# Altium PCB Cap_Sensor_hand.PcbDoc
Units mm, origin at the board's own origin, x right, y up, seen from the top; angles counter-clockwise.
Board outline 77.76 x 70.14 mm, 2 copper layers (Top Layer, Bottom Layer); 69 components, 50 nets, 250 pads, 279 vias.
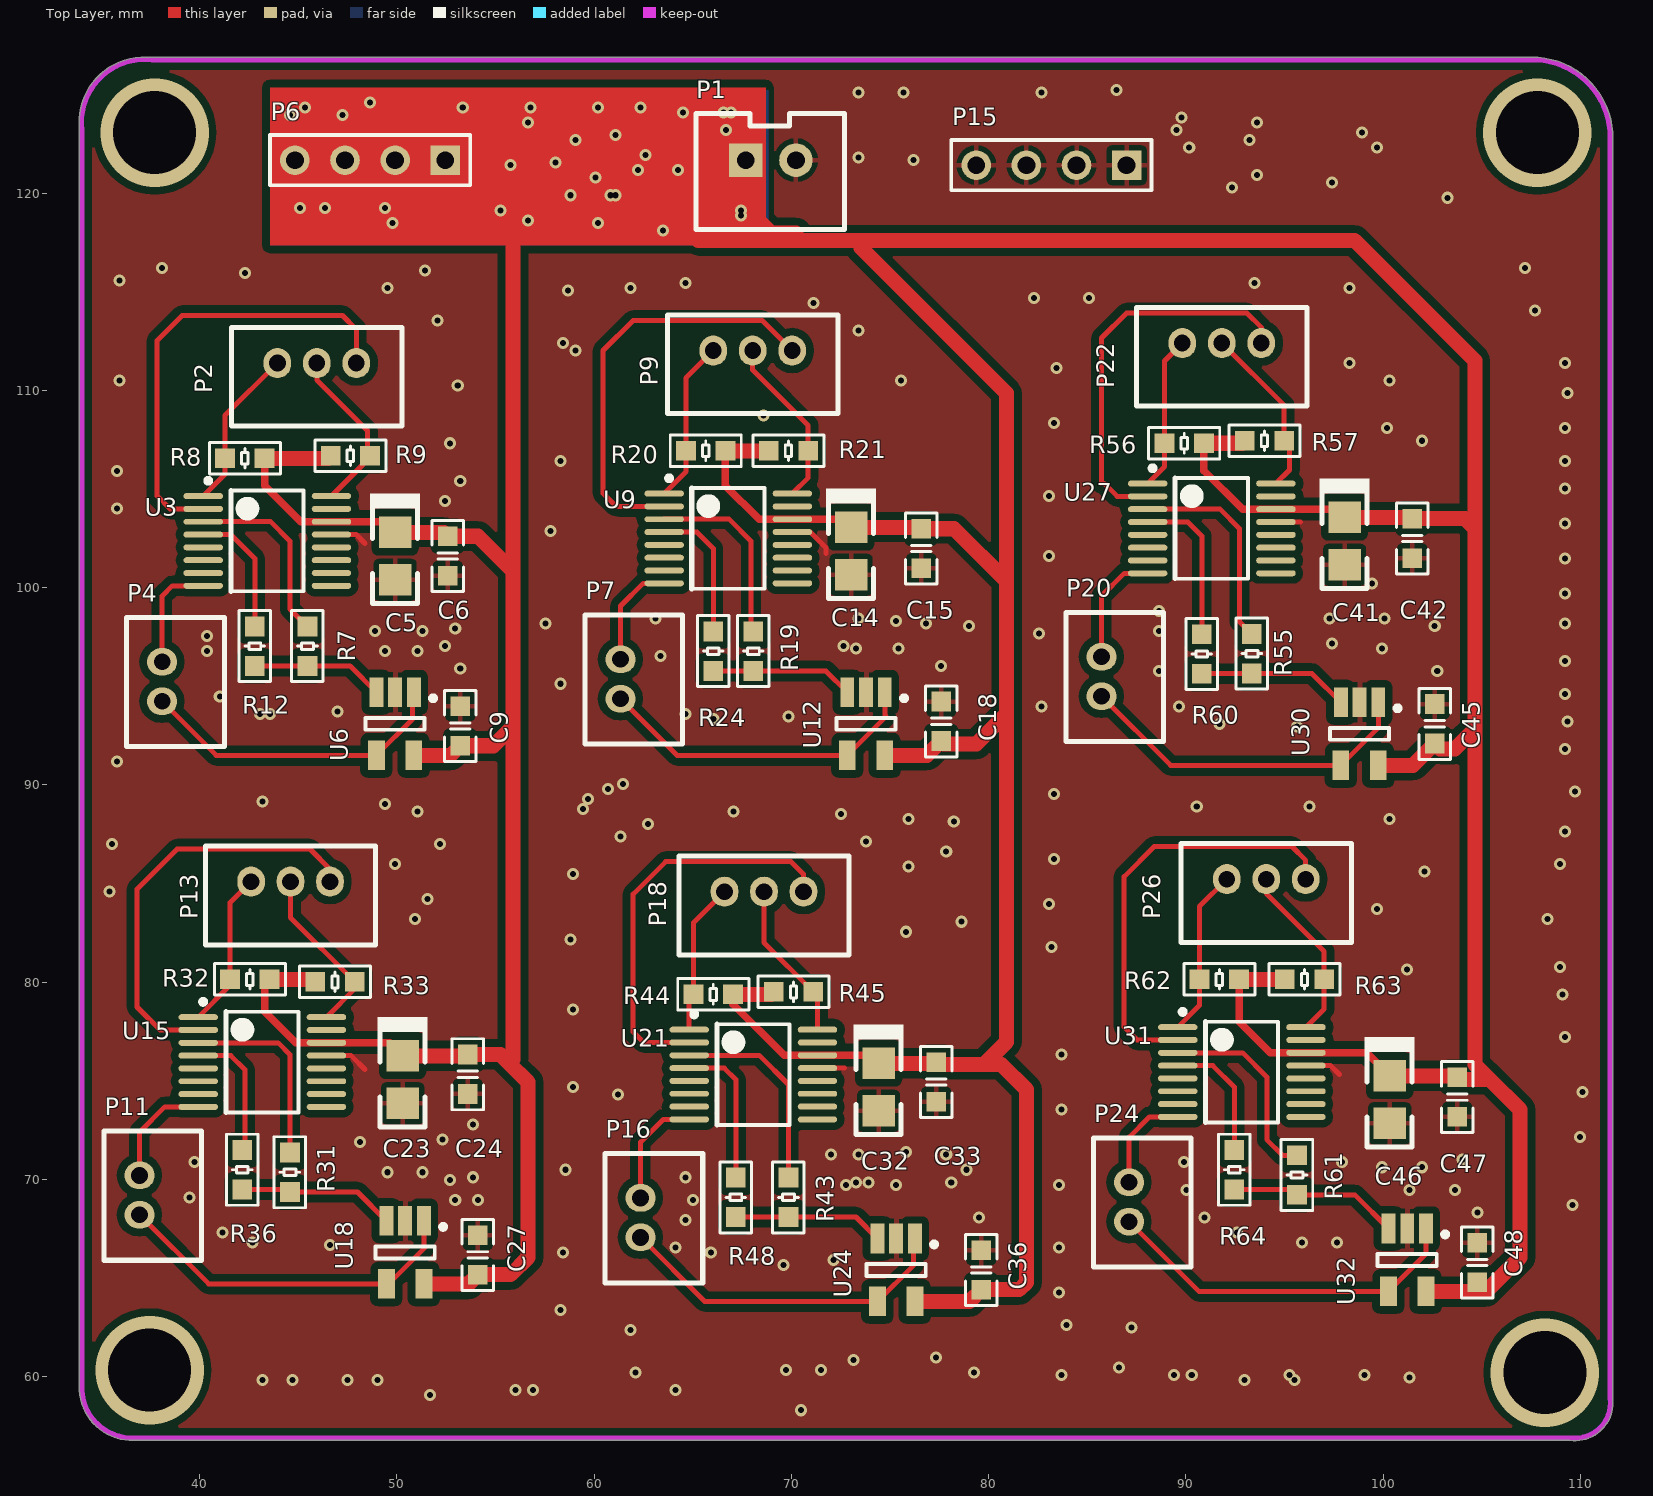
[diagram p0: Top Layer view]
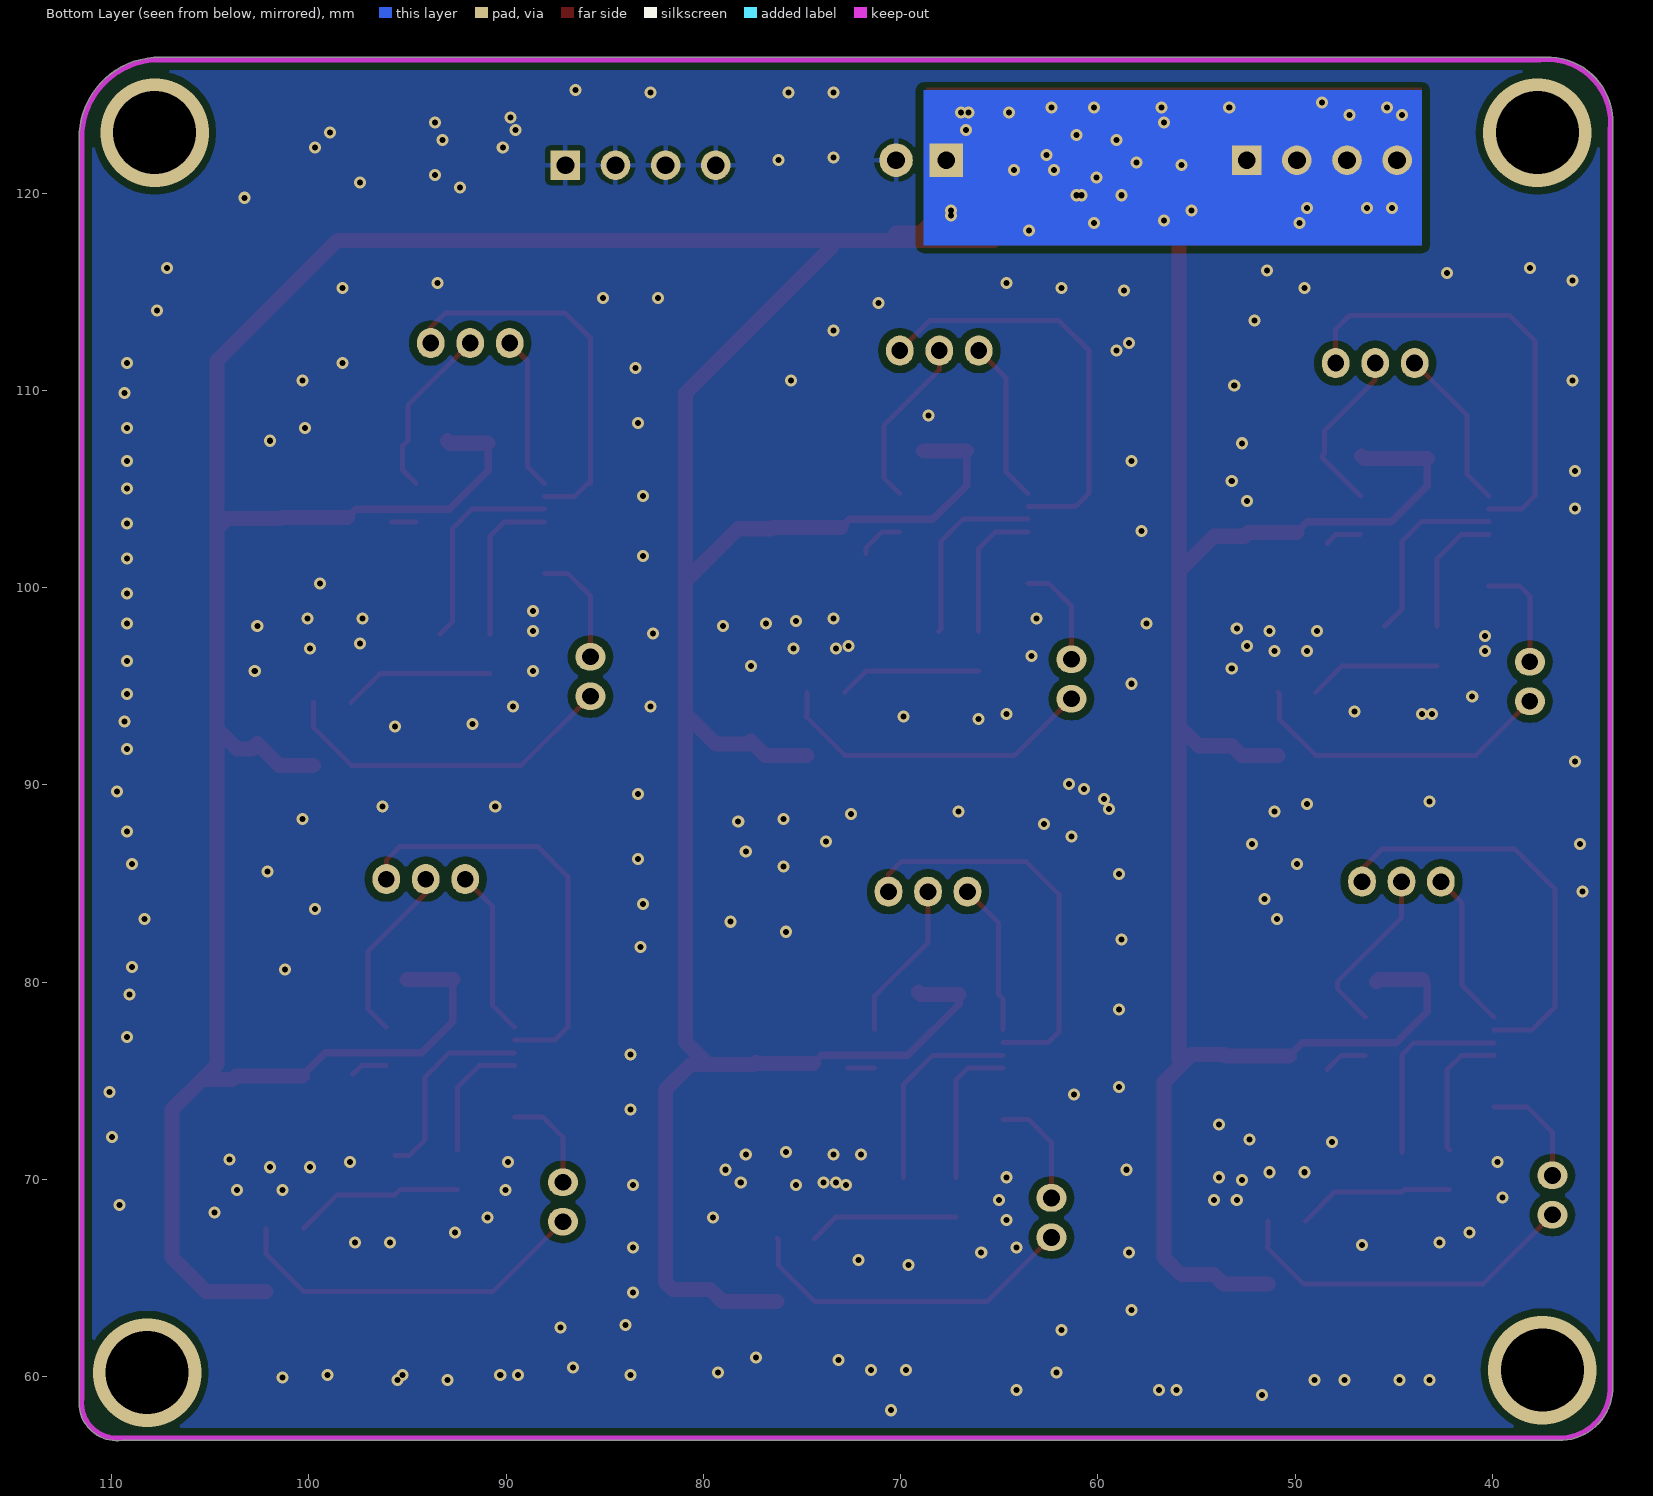
[diagram p1: Bottom Layer view, seen from below]
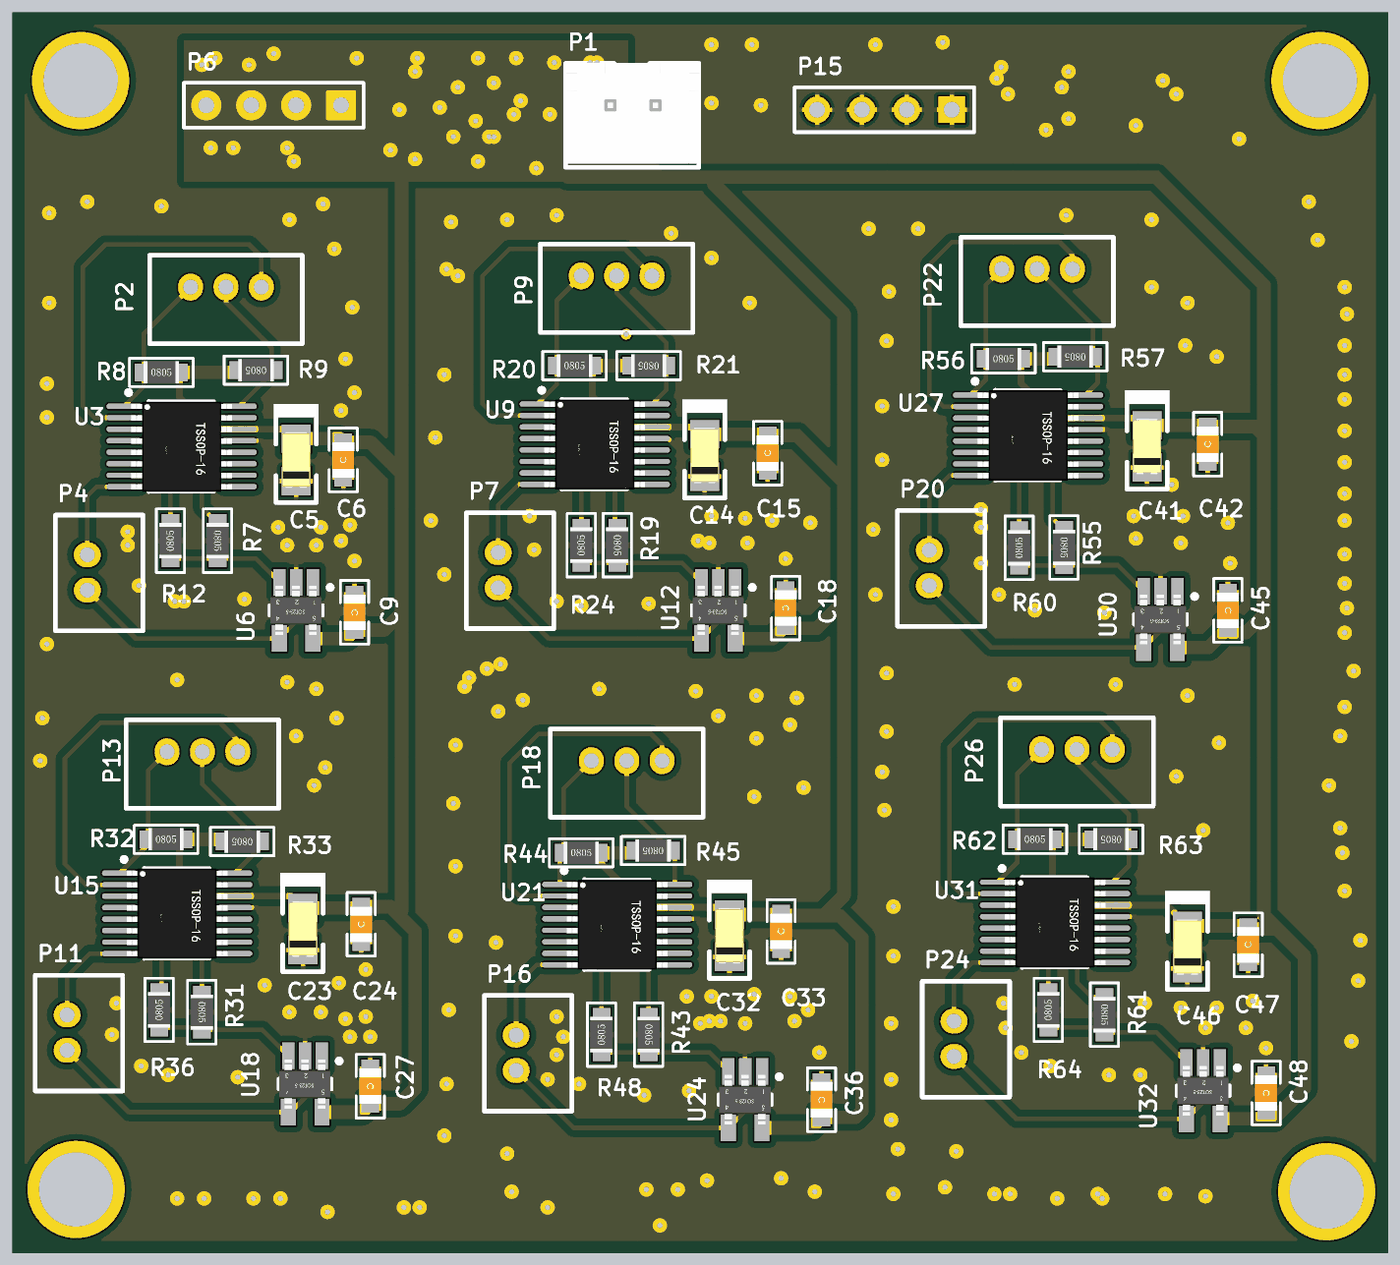
[diagram p2: 3D render of the assembled board from above, using the file's embedded part models]

## Layer stack, top to bottom
Top Solder: solder mask 0.0102, Solder Resist, Dk 3.5
Top Layer: signal copper 0.0356
Dielectric 1: dielectric 0.32, FR-4, Dk 4.8
Bottom Layer: signal copper 0.0356
Bottom Solder: solder mask 0.0102, Solder Resist, Dk 3.5

## Board outline
36.443,56.769 cw(c36.576,59.436) 33.909,59.303 cw(c34.036,59.309) 33.909,59.309 33.909,123.182 cw(c37.211,123.571) 37.6,126.873 107.823,126.873 cw(c107.823,126.746) 107.84,126.872 cw(c107.84,126.745) 107.849,126.872 cw(c107.569,122.809) 111.633,123.071 cw(c107.569,122.809) 111.642,122.809 cw(c111.514,122.809) 111.633,122.764 111.633,58.929 cw(c111.51,58.897) 111.637,58.913 cw(c109.728,58.674) 111.651,58.674 cw(c109.728,58.674) 109.465,56.769 36.449,56.769 cw(c36.449,56.896)

## Design rules (kind name [scope] priority, off if disabled: settings)
Clearance Clearance_1 [InPolygon] p1: gap=0.381 ignorepadtopadclearanceinfootprint=FALSE except(0: Arc-Hole Track-Hole SMDPad-Hole THPad-Hole Via-Hole Fill-Hole Poly-Hole Region-Hole Text-Hole)
Clearance [All] p2: gap=0.152 ignorepadtopadclearanceinfootprint=FALSE except(0: Arc-Hole Track-Hole SMDPad-Hole THPad-Hole Via-Hole Fill-Hole Poly-Hole Region-Hole Text-Hole)
PolygonConnect [All] p1: connectstyle=Relief reliefconductorwidth=0.254 reliefentries=4 polygonreliefangle="90 Angle" airgapwidth=0.254
RoutingVias [All] p1: holewidth=0.711 width=1.27 viastyle="Through Hole" minholewidth=0.711 minwidth=1.27 maxholewidth=0.711 maxwidth=1.27
SolderMaskExpansion [All] p1: expansion=0.102
Width [All] p1: maxlimit=1.27 minlimit=0.254 preferedwidth=0.762
30 further rules are at their usual default settings.

## Classes and differential pairs
component class Cap_Sensor_hand: C5 C6 C9 C14 C15 C18 C23 C24 C27 C32 C33 C36 C41 C42 C45 C46 C47 C48 R7 R8 R9 R12 R19 R20 R21 R24 R31 R32 R33 R36 R43 R44 R45 R48 R55 R56 R57 R60 R61 R62 R63 R64 U3 U6 U9 U12 U15 U18 U21 U24 U27 U30 U31 U32
component class power_and_interface: P1 P2 P4 P6 P7 P9 P11 P13 P15 P16 P18 P20 P22 P24 P26

## Components (designator, comment, footprint, x,y, rotation, side; value= is the part's Value field where it differs from the comment)
C5 "Cap Pol2" Cap-TA 49.911,101.6 r90 top value=10uF
C6 "Cap" 0805C 52.578,101.6 r90 top value=100nF
C9 "Cap" 0805C 53.213,92.98 r270 top value=100nF
C14 "Cap Pol2" Cap-TA 73.025,101.854 r90 top value=10uF
C15 "Cap" 0805C 76.581,101.981 r90 top value=100nF
C18 "Cap" 0805C 77.597,93.218 r270 top value=100nF
C23 "Cap Pol2" Cap-TA 50.292,75.057 r90 top value=10uF
C24 "Cap" 0805C 53.594,75.327 r90 top value=100nF
C27 "Cap" 0805C 54.102,66.167 r270 top value=100nF
C32 "Cap Pol2" Cap-TA 74.422,74.676 r90 top value=10uF
C33 "Cap" 0805C 77.343,74.93 r90 top value=100nF
C36 "Cap" 0805C 79.629,65.405 r270 top value=100nF
C41 "Cap Pol2" Cap-TA 98.044,102.362 r90 top value=10uF
C42 "Cap" 0805C 101.473,102.489 r90 top value=100nF
C45 "Cap" 0805C 102.616,93.091 r270 top value=100nF
C46 "Cap Pol2" Cap-TA 100.33,74.041 r90 top value=10uF
C47 "Cap" 0805C 103.759,74.168 r90 top value=100nF
C48 "Cap" 0805C 104.775,65.786 r270 top value=100nF
P1 "Header 2" XH2.54-LI-2P 68.961,121.666 r0 top
P2 "Header 3" XH2.0_3p 45.942,111.379 r0 top
P4 "Header 2" XH2.0_2p 38.1,95.234 r90 top
P6 "Header 4" HDR1X4 52.451,121.666 r180 top
P7 "Header 2" XH2.0_2p 61.341,95.361 r90 top
P9 "Header 3" XH2.0_3p 68.04,112.014 r0 top
P11 "Header 2" XH2.0_2p 36.957,69.199 r90 top
P13 "Header 3" XH2.0_3p 44.609,85.09 r0 top
P15 "Header 4" HDR1X4 86.995,121.412 r180 top
P16 "Header 2" XH2.0_2p 62.357,68.056 r90 top
P18 "Header 3" XH2.0_3p 68.612,84.582 r0 top
P20 "Header 2" XH2.0_2p 85.725,95.488 r90 top
P22 "Header 3" XH2.0_3p 91.821,112.395 r0 top
P24 "Header 2" XH2.0_2p 87.122,68.85 r90 top
P26 "Header 3" XH2.0_3p 94.075,85.217 r0 top
R7 "Res" 0805R 45.466,97.028 r270 top value=100k
R8 "Res" 0805R 42.291,106.553 r0 top value=3k3
R9 "Res" 0805R 47.641,106.68 r180 top value=3k3
R12 "Res" 0805R 42.799,97.028 r90 top value=118k
R19 "Res" 0805R 68.072,96.774 r270 top value=100k
R20 "Res" 0805R 65.659,106.934 r0 top value=3k3
R21 "Res" 0805R 69.85,106.934 r180 top value=3k3
R24 "Res" 0805R 66.04,96.774 r90 top value=118k
R31 "Res" 0805R 44.577,70.358 r270 top value=100k
R32 "Res" 0805R 42.545,80.137 r0 top value=3k3
R33 "Res" 0805R 46.863,80.01 r180 top value=3k3
R36 "Res" 0805R 42.164,70.485 r90 top value=118k
R43 "Res" 0805R 69.85,69.088 r270 top value=100k
R44 "Res" 0805R 66.04,79.375 r0 top value=3k3
R45 "Res" 0805R 70.104,79.502 r180 top value=3k3
R48 "Res" 0805R 67.183,69.088 r90 top value=118k
R55 "Res" 0805R 93.345,96.647 r270 top value=100k
R56 "Res" 0805R 89.916,107.315 r0 top value=3k3
R57 "Res" 0805R 93.98,107.442 r180 top value=3k3
R60 "Res" 0805R 90.805,96.631 r90 top value=118k
R61 "Res" 0805R 95.631,70.215 r270 top value=100k
R62 "Res" 0805R 91.694,80.137 r0 top value=3k3
R63 "Res" 0805R 96.012,80.137 r180 top value=3k3
R64 "Res" 0805R 92.456,70.485 r90 top value=118k
U3 "AD7746" TSSOP16 43.434,102.362 r0 top
U6 "AD8515" sot23-5 49.911,93.091 r270 top
U9 "AD7746" TSSOP16 66.802,102.489 r0 top
U12 "AD8515" sot23-5 73.787,93.091 r270 top
U15 "AD7746" TSSOP16 43.18,75.946 r0 top
U18 "AD8515" sot23-5 50.419,66.294 r270 top
U21 "AD7746" TSSOP16 68.072,75.311 r0 top
U24 "AD8515" sot23-5 75.311,65.405 r270 top
U27 "AD7746" TSSOP16 91.313,102.997 r0 top
U30 "AD8515" sot23-5 98.806,92.583 r270 top
U31 "AD7746" TSSOP16 92.837,75.438 r0 top
U32 "AD8515" sot23-5 101.219,65.913 r270 top

## Footprints (in the part's own frame and the unit in brackets; to place one, negate y for a bottom-side part, rotate by r counter-clockwise, add the part's x,y. Pads: shape width x height; smd on the part's side, far side on the other; paste and mask are expansions set on the pad)
0805C [mm]
  rect 1x1 smd: 1(-1,0) 2(1,0)
  silkscreen extent -1.8,-0.8 1.8,0.8, body extent -1.01,-0.62 1,0.63, height 0.92
0805R [mm]
  rect 1x1 smd: 1(-1,0) 2(1,0)
  silkscreen extent -1.8,-0.8 1.8,0.8, body extent -1,-0.63 1,0.63, height 0.55
Cap-TA [mm]
  rect 1.6x1.65 smd: 1(1.2,0) 2(-1.2,0)
  silkscreen extent -2.41,-1.27 3.17,1.27, body extent -1.6,-0.8 1.6,0.8, height 1.61
HDR1X4 [mm] "Connector; Header; 4 Position"
  rect 1.5x1.5 hole 0.9: 1(0,0)
  round 1.5 hole 0.9: 2(2.54,0) 3(5.08,0) 4(7.62,0)
  silkscreen extent -1.27,-1.27 8.89,1.27
sot23-5 [mm]
  rect 1.5x0.7 smd: 1(-1.595,0.95) 2(-1.595,0) 3(-1.595,-0.95)
  rect 1.5x0.85 smd: 4(1.595,-0.95) 5(1.595,0.95)
  silkscreen extent -1.42,-1.5 0.3,2.05, body extent -1.39,-1.46 1.41,1.44, height 1.09
TSSOP16 [mm]
  oval 2x0.3 smd: 1(-3.25,2.275) 2(-3.25,1.625) 3(-3.25,0.975) 4(-3.25,0.325) 5(-3.25,-0.325) 6(-3.25,-0.975) 7(-3.25,-1.625) 8(-3.25,-2.275) 9(3.25,-2.275) 10(3.25,-1.625) 11(3.25,-0.975) 12(3.25,-0.325) 13(3.25,0.325) 14(3.25,0.975) 15(3.25,1.625) 16(3.25,2.275)
  silkscreen extent -3.12,-2.55 1.83,3.17, body extent -2.85,-2.56 2.85,2.54, height 1.45
XH2.0_2p [mm]
  oval 1.4x1.524 hole 0.85: 1(-1,0) 2(1,0)
  silkscreen extent -3.3,-3.15 3.25,1.8
XH2.0_3p [mm]
  oval 1.4x1.524 hole 0.85: 1(-2,0) 2(0,0) 3(2,0)
  silkscreen extent -4.32,-3.2 4.32,1.8
XH2.54-LI-2P [mm] "接插件，2P"
  rect 1.7x1.7 hole 0.9: 1(-1.27,0)
  round 1.7 hole 0.9: 2(1.27,0)
  silkscreen extent -3.81,-3.51 3.74,2.37, body extent -3.77,-3.3 3.77,2.4, height 7.05

## Part data
C5 C14 C23 C32 C41 C46: "Polarized Capacitor (Axial)", LatestRevisionDate=17-Jul-2002, LatestRevisionNote="Re-released for DXP Platform.", PackageDescription="Polarized Capacitor; 2 Leads", PackageReference=POLAR0.8, Published=8-Jun-2000, Publisher="Altium Limited"
C6 C9 C15 C18 C24 C27 C33 C36 C42 C45 C47 C48: "Capacitor", LatestRevisionDate=17-Jul-2002, LatestRevisionNote="Re-released for DXP Platform.", PackageDescription="Radial Cap, Thru-Hole; 2 Leads; 0.3 in Pin Spacing", PackageReference=RAD-0.3, Published=8-Jun-2000, Publisher="Altium Limited"
P1 P4 P7 P11 P16 P20 P24: "Header, 2-Pin", LatestRevisionDate=17-Jul-2002, LatestRevisionNote="Re-released for DXP Platform.", Publisher="Altium Limited"
P2 P9 P13 P18 P22 P26: "Header, 3-Pin", LatestRevisionDate=17-Jul-2002, LatestRevisionNote="Re-released for DXP Platform.", Publisher="Altium Limited"
P6 P15: "Header, 4-Pin", LatestRevisionDate=17-Jul-2002, LatestRevisionNote="Re-released for DXP Platform.", Publisher="Altium Limited"
R7 R8 R9 R12 R19 R20 R21 R24 R31 R32 R33 R36 R43 R44 R45 R48 R55 R56 R57 R60 R61 R62 R63 R64: "Resistor", LatestRevisionDate=17-Jul-2002, LatestRevisionNote="Re-released for DXP Platform.", PackageDescription="Axial Device, Thru-Hole; 2 Leads; 0.4 in Pin Spacing", PackageReference=AXIAL-0.4, Published=8-Jun-2000, Publisher="Altium Limited"

## Via types
v1: diameter 0.61, hole 0.305, Top Layer to Bottom Layer, 275 vias
v2: diameter 5.5, hole 4.2, Top Layer to Bottom Layer, 4 vias

## Nets (pads, with @x,y where several pads share a name; then routed paths per layer and width w, separated by ;. In a path a pad name is that pad's centre, name@x,y a point inside that pad or via, vN(x,y) a via of type N, cw(c..) or ccw(c..) an arc to the next point about the centre after c; other vN are vias at no path point)
GND: C5.2 C6.1 C9.1 C14.2 C15.1 C18.1 C23.2 C24.1 C27.1 C32.2 C33.1 C36.1 C41.2 C42.1 C45.1 C46.2 C47.1 C48.1 P1.2 P15.1 P15.2 P15.3 P15.4 U3.13 U6.2 U9.13 U12.2 U15.13 U18.2 U21.13 U24.2 U27.13 U30.2 U31.13 U32.2 | length 11
  Top Layer w0.254: U15.13 47.681,76.271 48.387,75.565 ; U3.13 47.935,102.687 48.387,102.235 ; U9.13 70.959,102.814 71.755,102.018 71.755,101.727 ; U21.13 72.7,75.636 ; U27.13 95.814,103.322 ; U31.13 97.338,75.763 97.79,75.311
  other v1: 70.485,58.293 51.689,59.055 56.007,59.309 56.896,59.309 64.135,59.309 43.18,59.817 44.704,59.817 47.498,59.817 49.022,59.817 92.964,59.817 95.504,59.817 101.346,59.944 83.693,60.071 89.408,60.071 90.297,60.071 95.25,60.071 99.06,60.071 62.103,60.198 79.248,60.198 69.723,60.325 71.501,60.325 86.614,60.452 73.152,60.833 77.343,60.96 61.849,62.357 87.249,62.484 83.947,62.611 58.293,63.373 83.566,64.262 69.596,65.659 72.136,65.913 58.42,66.294 65.913,66.294 64.135,66.548 83.566,66.548 46.609,66.675 42.672,66.802 95.885,66.802 97.663,66.802 41.148,67.31 92.583,67.31 64.643,67.945 79.502,68.072 90.932,68.072 104.775,68.326 109.601,68.707 52.959,68.961 54.102,68.961 65.024,68.961 39.497,69.088 90.043,69.469 101.346,69.469 103.632,69.469 72.771,69.723 75.311,69.723 83.566,69.723 73.279,69.85 73.914,69.85 78.105,69.85 52.705,69.977 53.848,70.104 64.643,70.104 49.53,70.358 51.308,70.358 58.547,70.485 78.867,70.485 99.949,70.612 101.981,70.612 39.751,70.866 89.916,70.866 97.917,70.866 104.013,70.993 72.009,71.247 73.406,71.247 77.851,71.247 75.819,71.374 48.133,71.882 52.324,72.009 109.982,72.136 53.848,72.771 83.693,73.533 61.214,74.295 110.109,74.422 58.928,74.676 83.693,76.327 109.22,77.216 58.928,78.613 109.093,79.375 101.219,80.645 108.966,80.772 83.185,81.788 58.801,82.169 75.819,82.55 78.613,83.058 50.927,83.185 108.331,83.185 99.695,83.693 83.058,83.947 51.562,84.201 35.433,84.582 58.928,85.471 102.108,85.598 75.946,85.852 49.911,85.979 108.966,85.979 83.312,86.233 77.851,86.614 35.56,86.995 52.197,86.995 73.787,87.122 61.341,87.376 109.22,87.63 62.738,88.011 78.232,88.138 75.946,88.265 100.33,88.265 72.517,88.519 51.054,88.646 67.056,88.646 59.436,88.773 90.551,88.9 96.266,88.9 49.403,89.027 43.18,89.154 59.69,89.281 83.312,89.535 109.728,89.662 60.706,89.789 61.468,90.043 35.814,91.186 109.22,91.821 95.631,92.964 91.694,93.091 109.347,93.218 66.04,93.345 69.85,93.472 43.053,93.599 43.561,93.599 64.643,93.599 46.99,93.726 82.677,93.98 89.662,93.98 41.021,94.488 109.22,94.615 58.293,95.123 88.646,95.758 102.743,95.758 53.213,95.885 77.597,96.012 109.22,96.266 63.373,96.52 40.386,96.774 49.403,96.774 51.054,96.774 73.279,96.901 75.438,96.901 99.949,96.901 52.451,97.028 72.644,97.028 97.409,97.155 40.386,97.536 82.55,97.663 48.895,97.79 51.308,97.79 88.646,97.79 52.959,97.917 78.994,98.044 102.616,98.044 57.531,98.171 76.835,98.171 109.22,98.171 75.311,98.298 63.119,98.425 73.406,98.425 97.282,98.425 100.076,98.425 88.646,98.806 109.22,99.695 99.441,100.203 109.22,101.473 83.058,101.6 57.785,102.87 109.22,103.251 35.814,104.013 52.451,104.394 83.058,104.648 109.22,105.029 53.213,105.41 35.814,105.918 58.293,106.426 109.22,106.426 52.705,107.315 101.981,107.442 100.203,108.077 109.22,108.077 83.312,108.331 68.58,108.712 109.347,109.855 53.086,110.236 35.941,110.49 75.565,110.49 100.33,110.49 83.439,111.125 98.298,111.379 109.22,111.379 59.055,112.014 58.42,112.395 73.406,113.03 52.07,113.538 107.696,114.046 71.12,114.427 82.296,114.681 85.09,114.681 58.674,115.062 49.53,115.189 61.849,115.189 98.298,115.189 64.643,115.443 93.472,115.443 35.941,115.57 42.291,115.951 51.435,116.078 38.1,116.205 107.188,116.205 103.251,119.761 92.329,120.269 97.409,120.523 93.599,120.904 76.2,121.666 73.406,121.793 90.17,122.301 99.695,122.301 93.218,122.682 98.933,123.063 89.535,123.19 93.599,123.571 89.789,123.825 73.406,125.095 75.692,125.095 82.677,125.095 86.487,125.222
NetR7_1: R7.1 U3.3 | length 9.5
  Top Layer w0.254: U3.3 43.602,103.337 44.577,102.362 44.577,98.917 R7.1
NetR7_2: R7.2 R12.1 U6.3 | length 6.7
  Top Layer w0.254: R12.1 R7.2 47.619,96.028 U6.3
NetR12_2: R12.2 U3.4 | length 6.6
  Top Layer w0.254: U3.4 41.585,102.687 42.799,101.473 R12.2
NetR19_1: R19.1 U9.3 | length 9.5
  Top Layer w0.254: U9.3 66.843,103.464 67.945,102.362 67.945,97.901 R19.1
NetR19_2: R19.2 R24.1 U12.3 | length 7.2
  Top Layer w0.254: R24.1 R19.2 71.749,95.774 U12.3
NetR24_2: R24.2 U9.4 | length 7
  Top Layer w0.254: U9.4 65.207,102.814 66.04,101.981 R24.2
NetR31_1: R31.1 U15.3 | length 9.9
  Top Layer w0.254: U15.3 43.983,76.921 44.577,76.327 R31.1
NetR31_2: R31.2 R36.1 U18.3 | length 8
  Top Layer w0.254: R36.1 44.45,69.485 R31.2 48,69.358 U18.3
NetR36_2: R36.2 U15.4 | length 6.8
  Top Layer w0.254: U15.4 41.585,76.271 42.291,75.565 42.291,71.612 R36.2
NetR43_1: R43.1 U21.3 | length 10.4
  Top Layer w0.254: U21.3 68.367,76.286 69.85,74.803 R43.1
NetR43_2: R43.2 R48.1 U24.3 | length 7.6
  Top Layer w0.254: R48.1 R43.2 73.273,68.088 U24.3
NetR48_2: R48.2 U21.4 | length 7.6
  Top Layer w0.254: U21.4 66.604,75.636 67.183,75.057 R48.2
NetR55_1: R55.1 U27.3 | length 10.7
  Top Layer w0.254: U27.3 91.735,103.972 92.71,102.997 92.71,98.282 R55.1
NetR55_2: R55.2 R60.1 U30.3 | length 7.7
  Top Layer w0.254: R60.1 93.329,95.631 R55.2 96.387,95.647 U30.3
NetR60_2: R60.2 U27.4 | length 8
  Top Layer w0.254: U27.4 90.099,103.322 90.805,102.616 R60.2
NetR61_1: R61.1 U31.3 | length 10.1
  Top Layer w0.254: U31.3 92.878,76.413 94.107,75.184 94.107,72.009 94.901,71.215 R61.1
NetR61_2: R61.2 R64.1 U32.3 | length 8.6
  Top Layer w0.254: R64.1 95.361,69.485 R61.2 98.562,69.215 U32.3
NetR64_2: R64.2 U31.4 | length 6.5
  Top Layer w0.254: U31.4 91.369,75.763 92.456,74.676 R64.2
RDY1: P2.3 U3.2 | length 23.1
  Top Layer w0.254: U3.2 38.507,103.987 37.846,104.648 37.846,112.522 39.116,113.792 47.243,113.792 47.942,113.093 P2.3
RDY2: P9.3 U9.2 | length 21.5
  Top Layer w0.254: U9.2 61.24,104.114 61.214,104.14 61.087,104.14 60.452,104.775 60.452,112.014 61.976,113.538 68.516,113.538 P9.3
RDY3: P13.3 U15.2 | length 21.2
  Top Layer w0.254: U15.2 37.999,77.571 36.83,78.74 36.83,84.709 38.862,86.741 45.593,86.741 46.609,85.725 P13.3
RDY4: P18.3 U21.2 | length 20.5
  Top Layer w0.254: U21.2 62.51,76.936 61.976,77.47 61.976,84.455 63.627,86.106 69.977,86.106 70.612,85.471 P18.3
RDY5: P22.3 U27.2 | length 19.7
  Top Layer w0.254: U27.2 86.513,104.622 85.852,105.283 85.725,105.283 85.725,112.649 86.995,113.919 93.091,113.919 93.821,113.189 P22.3
RDY6: P26.3 U31.2 | length 21.7
  Top Layer w0.254: U31.2 87.529,77.063 86.868,77.724 86.868,85.344 88.392,86.868 95.377,86.868 96.075,86.17 P26.3
SCL1: P2.1 R8.1 U3.1 | length 8.3
  Top Layer w0.254: U3.1 41.291,105.744 R8.1 41.291,108.728 P2.1
SCL2: P9.1 R20.1 U9.1 | length 8.3
  Top Layer w0.254: U9.1 64.659,105.871 R20.1 64.659,110.633 P9.1
SCL3: P13.1 R32.1 U15.1 | length 8
  Top Layer w0.254: U15.1 41.545,79.836 R32.1 41.545,84.026 P13.1
SCL4: P18.1 R44.1 U21.1 | length 7.7
  Top Layer w0.254: U21.1 64.822,79.157 R44.1 65.04,83.01 P18.1
SCL5: P22.1 R56.1 U27.1 | length 7.9
  Top Layer w0.254: U27.1 88.916,106.125 R56.1 88.916,111.49 P22.1
SCL6: P26.1 R62.1 U31.1 | length 8.5
  Top Layer w0.254: U31.1 90.694,78.82 R62.1 90.694,83.836 P26.1
SDA1: P2.2 R9.1 U3.16 | length 8.7
  Top Layer w0.254: P2.2 45.942,110.522 48.514,107.95 48.514,106.807 R9.1 48.641,106.594 U3.16
SDA2: P9.2 R21.1 U9.16 | length 8.7
  Top Layer w0.254: P9.2 68.04,111.03 70.85,108.22 R21.1 70.85,105.562 U9.16
SDA3: P13.2 R33.1 U15.16 | length 8.8
  Top Layer w0.254: P13.2 44.609,83.264 R33.1 47.863,79.654 U15.16
SDA4: P18.2 R45.1 U21.16 | length 8.1
  Top Layer w0.254: P18.2 68.612,81.994 R45.1 71.322,79.284 U21.16
SDA5: P22.2 R57.1 U27.16 | length 8.8
  Top Layer w0.254: P22.2 94.98,109.236 R57.1 95.25,107.172 95.25,105.959 U27.16
SDA6: P26.2 R63.1 U31.16 | length 9.1
  Top Layer w0.254: P26.2 94.075,84.487 97.012,81.55 R63.1 97.012,78.638 U31.16
SwitchDown_1: P4.2 U3.8 | length 5.6
  Top Layer w0.254: P4.2 38.1,99.568 38.619,100.087 U3.8
SwitchDown_2: P7.2 U9.8 | length 5.4
  Top Layer w0.254: P7.2 61.341,99.06 62.495,100.214 U9.8
SwitchDown_3: P11.2 U15.8 | length 5.7
  Top Layer w0.254: P11.2 36.957,72.39 38.238,73.671 U15.8
SwitchDown_4: P16.2 U21.8 | length 5.8
  Top Layer w0.254: P16.2 62.357,71.882 63.511,73.036 U21.8
SwitchDown_5: P20.2 U27.8 | length 5.9
  Top Layer w0.254: P20.2 85.725,99.568 86.879,100.722 U27.8
SwitchDown_6: P24.2 U31.8 | length 5.2
  Top Layer w0.254: P24.2 87.122,72.136 88.149,73.163 U31.8
SwitchUp_1: P4.1 U6.1 U6.4 | length 16
  Top Layer w0.254: P4.1 40.838,91.496 U6.4 50.8,93.335 50.8,94.625 U6.1
SwitchUp_2: P7.1 U12.1 U12.4 | length 16.7
  Top Layer w0.254: P7.1 64.206,91.496 U12.4 72.837,91.506 74.803,93.472 74.737,93.538 U12.1
SwitchUp_3: P11.1 U18.1 U18.4 | length 18.1
  Top Layer w0.254: P11.1 40.457,64.699 U18.4 49.586,64.699 51.435,66.548 51.369,66.614 U18.1
SwitchUp_4: P16.1 U24.1 U24.4 | length 17.3
  Top Layer w0.254: P16.1 65.603,63.81 U24.4 76.2,65.649 76.2,66.939 U24.1
SwitchUp_5: P20.1 U30.1 U30.4 | length 17.6
  Top Layer w0.254: P20.1 89.225,90.988 U30.4 99.756,92.888 U30.1
SwitchUp_6: P24.1 U32.1 U32.4 | length 18.6
  Top Layer w0.254: P24.1 90.654,64.318 U32.4 100.269,64.328 102.169,66.228 U32.1
VDD_5V: C5.1 C6.2 C9.2 C14.1 C15.2 C18.2 C23.1 C24.2 C27.2 C32.1 C33.2 C36.2 C41.1 C42.2 C45.2 C46.1 C47.2 C48.2 P1.1 P6.1 P6.2 P6.3 P6.4 R8.2 R9.2 R20.2 R21.2 R32.2 R33.2 R44.2 R45.2 R56.2 R57.2 R62.2 R63.2 U3.14 U6.5 U9.14 U12.5 U15.14 U18.5 U21.14 U24.5 U27.14 U30.5 U31.14 U32.5 | length 351.2
  Top Layer w0.381: R8.2 43.307,106.537 43.307,105.156 45.126,103.337 U3.14 49.374,103.337 C5.1 ; R32.2 43.307,79.899 43.307,78.486 44.872,76.921 U15.14 49.628,76.921 C23.1 ; R20.2 66.659,105.172 68.367,103.464 U9.14 72.615,103.464 C14.1 ; R44.2 67.04,78.883 69.637,76.286 U21.14 74.012,76.286 C32.1 ; R56.2 90.916,105.934 92.878,103.972 U27.14 97.634,103.972 C41.1 ; R62.2 92.694,77.994 94.275,76.413 U31.14 99.158,76.413 C46.1
  Top Layer w0.762: R8.2 46.514,106.553 R9.2 ; R32.2 45.736,80.137 R33.2 ; C5.1 52.378,102.8 C6.2 54.118,102.6 55.88,100.838 ; C23.1 53.524,76.257 C24.2 55.245,76.327 55.689,75.882 ; U6.5 52.729,91.496 C9.2 54.896,91.98 55.88,92.964 ; U18.5 53.634,64.699 C27.2 55.769,65.167 56.642,66.04 56.642,74.93 55.689,75.882 ; 55.88,118.11 55.88,100.838 ; 60.833,118.491 61.341,118.999 ; 65.278,117.602 98.552,117.602 104.648,111.506 104.648,102.997 ; R20.2 R21.2 ; R44.2 68.977,79.375 R45.2 ; v1@67.564,119.38 68.961,117.983 70.231,117.983 69.977,117.729 67.818,117.729 ; C14.1 76.508,103.054 C15.2 78.248,102.981 80.899,100.33 ; 73.533,117.221 80.899,109.855 80.899,100.33 ; C32.1 77.289,75.876 C33.2 77.454,75.819 79.756,75.819 ; U12.5 76.875,91.496 C18.2 77.74,92.075 79.375,92.075 80.899,93.599 ; U24.5 79.034,63.81 C36.2 81.55,64.405 81.915,64.77 81.915,74.549 80.645,75.819 79.756,75.819 ; R56.2 92.853,107.315 R57.2 ; R62.2 R63.2 ; C41.1 101.4,103.562 C42.2 104.156,103.489 104.648,102.997 ; U30.5 101.513,90.988 C45.2 102.886,91.821 103.632,91.821 104.648,92.837 ; C46.1 103.686,75.241 C47.2 103.87,75.057 105.41,75.057 ; U32.5 105.212,64.318 106.934,66.04 106.934,73.533 105.41,75.057 ; 55.689,75.882 55.88,76.073 55.88,92.964 ; 55.88,92.964 55.88,100.838 ; 79.756,75.819 80.899,76.962 80.899,93.599 ; 80.899,93.599 80.899,100.33 ; 104.648,92.837 104.648,102.997 ; 104.648,92.837 104.648,75.819 105.41,75.057
  other v1: 63.5,118.11 49.784,118.491 60.198,118.491 56.642,118.618 67.437,118.872 55.245,119.126 67.437,119.126 45.085,119.253 46.355,119.253 49.403,119.253 58.801,119.888 60.833,119.888 61.087,119.888 60.071,120.777 62.23,121.158 64.262,121.158 55.753,121.412 58.039,121.539 62.611,121.92 59.055,122.682 61.087,122.936 66.675,123.19 56.642,123.571 44.577,123.952 47.244,123.952 64.516,124.079 66.548,124.079 66.929,124.079 45.339,124.333 53.34,124.333 56.769,124.333 60.198,124.333 62.357,124.333 48.641,124.587
pads on no net: U3.5 U3.6 U3.7 U3.9 U3.10 U3.11 U3.12 U3.15 U9.5 U9.6 U9.7 U9.9 U9.10 U9.11 U9.12 U9.15 U15.5 U15.6 U15.7 U15.9 U15.10 U15.11 U15.12 U15.15 U21.5 U21.6 U21.7 U21.9 U21.10 U21.11 U21.12 U21.15 U27.5 U27.6 U27.7 U27.9 U27.10 U27.11 U27.12 U27.15 U31.5 U31.6 U31.7 U31.9 U31.10 U31.11 U31.12 U31.15
copper on no net:
  other v2: 108.204,60.198 37.465,60.325 37.719,123.063 107.823,123.063

## Polygon pours and split planes (outlines as drawn)
GND on Top Layer "Top Layer-No Net" (solid, remove dead copper, pour order 0): 34.036,126.746 111.633,126.746 111.633,57.912 110.49,56.769 110.363,56.896 34.036,56.896
GND on Bottom Layer "Top Layer-No Net" (solid, remove dead copper, pour order 2): 34.163,126.619 34.29,126.746 111.633,126.746 111.633,56.896 111.506,56.769 33.909,56.769 33.909,126.492 34.163,126.746

## Keep-outs
Keep-Out Layer:
  lines w0.254: 107.823,126.746 37.592,126.746 ccw(c37.211,123.571) 34.036,123.19 34.036,62.992 34.036,59.309 ccw(c36.576,59.436) 36.449,56.896 109.474,56.896 ccw(c109.728,58.674) 111.51,58.897 ; 107.84,126.745 cw(c107.569,122.809) 111.514,122.809 ; 111.506,58.928 111.506,123.063

## Other copper
Top Layer:
  rectangle net VDD_5V: 43.561,117.348 68.707,125.349
Bottom Layer:
  rectangle net VDD_5V: 43.561,117.348 68.834,125.222